# Altium PCB TK514_Interrupter.PcbDoc
Units mm, origin at the board's own origin, x right, y up, seen from the top; angles counter-clockwise.
Board outline 77.5 x 82.75 mm, 4 copper layers (TopLayer, InternalPlane1, InternalPlane2, BottomLayer); 48 components, 29 nets, 198 pads, 356 vias.
Unrouted connection lines stored in the file: 3.
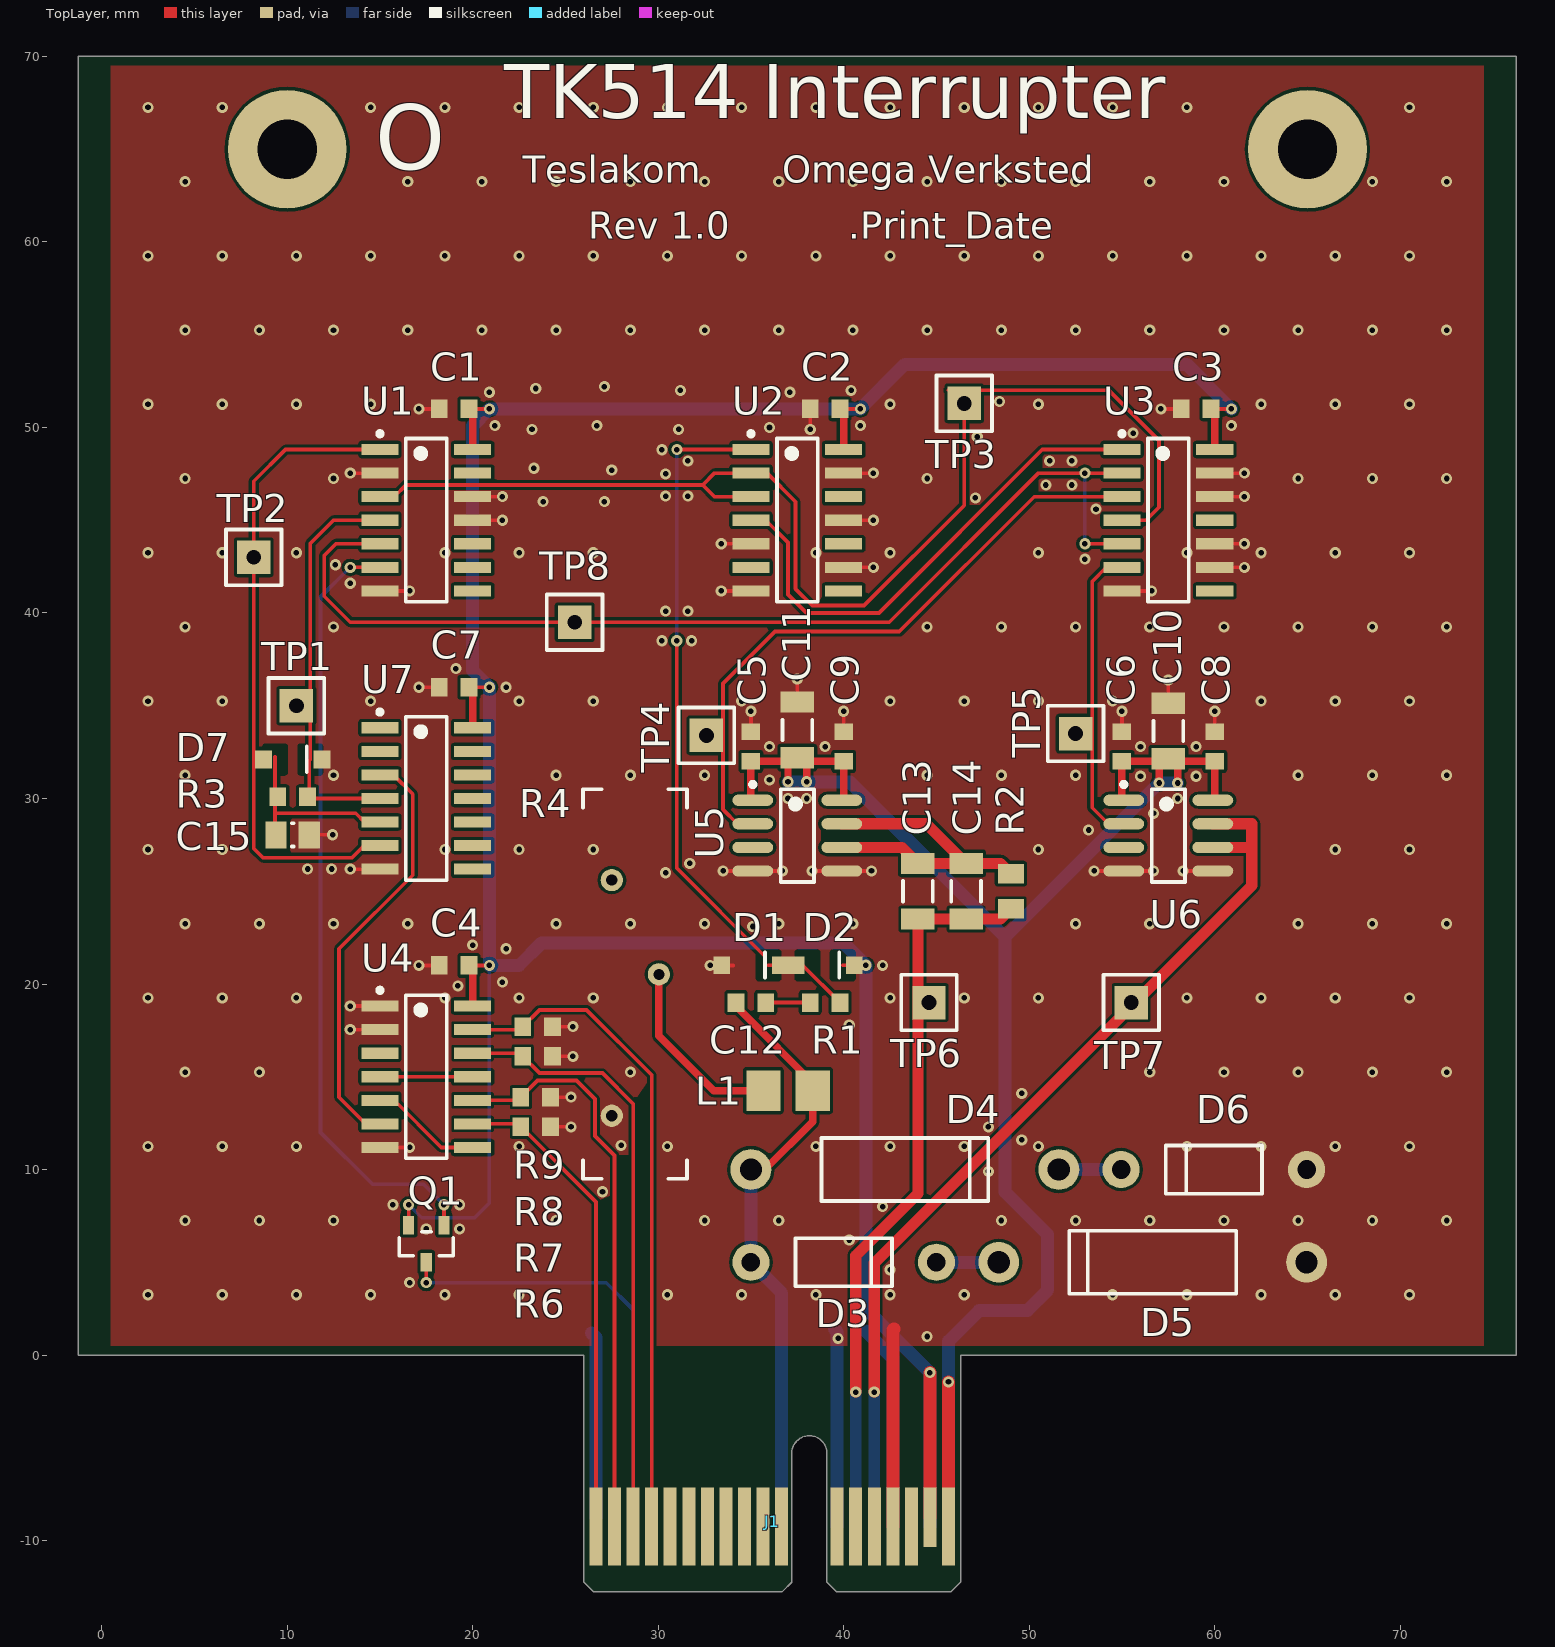
[diagram p0: TopLayer view]
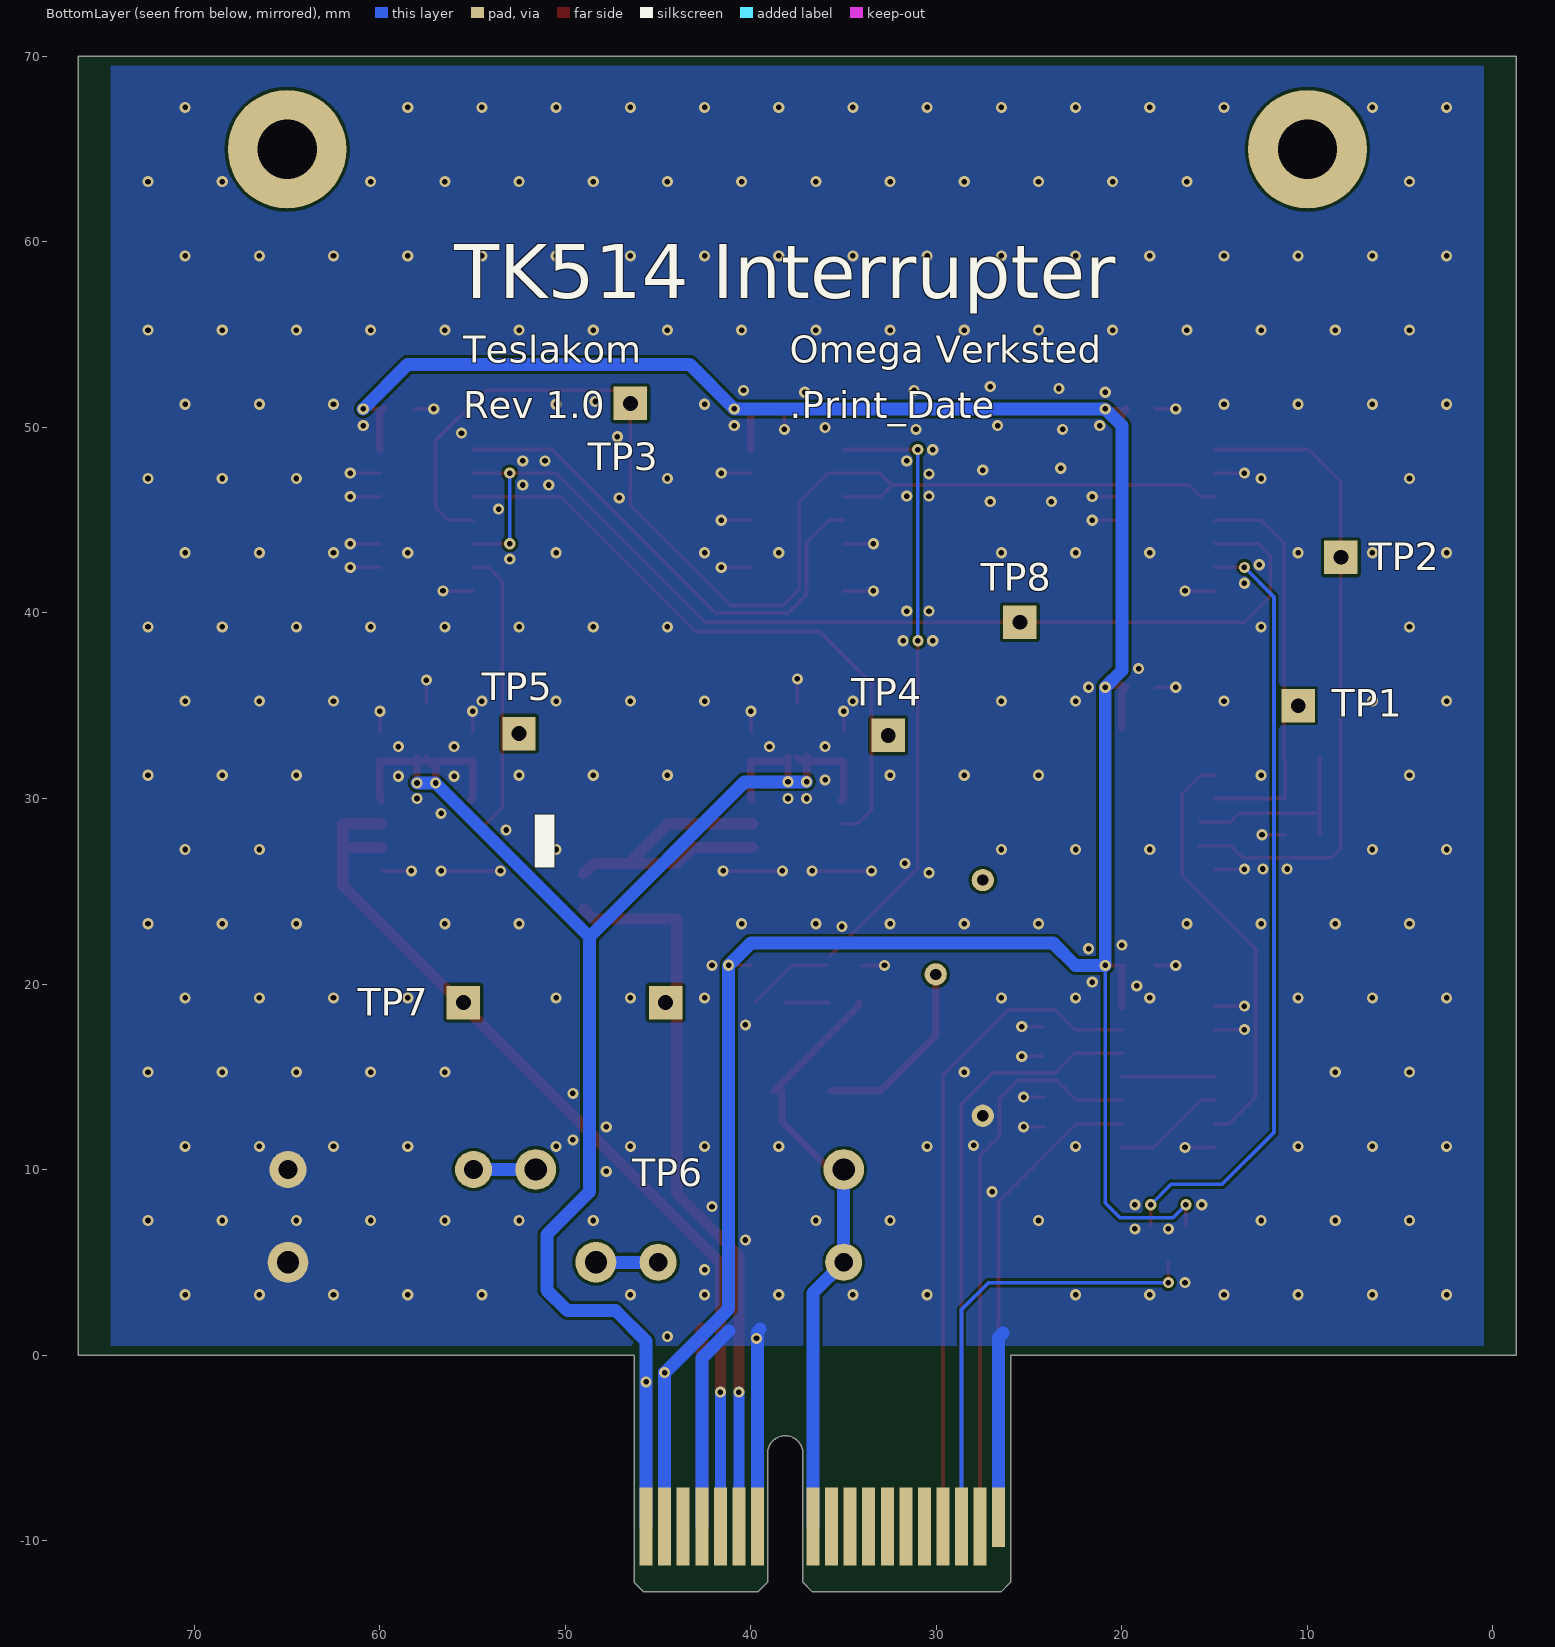
[diagram p1: BottomLayer view, seen from below]
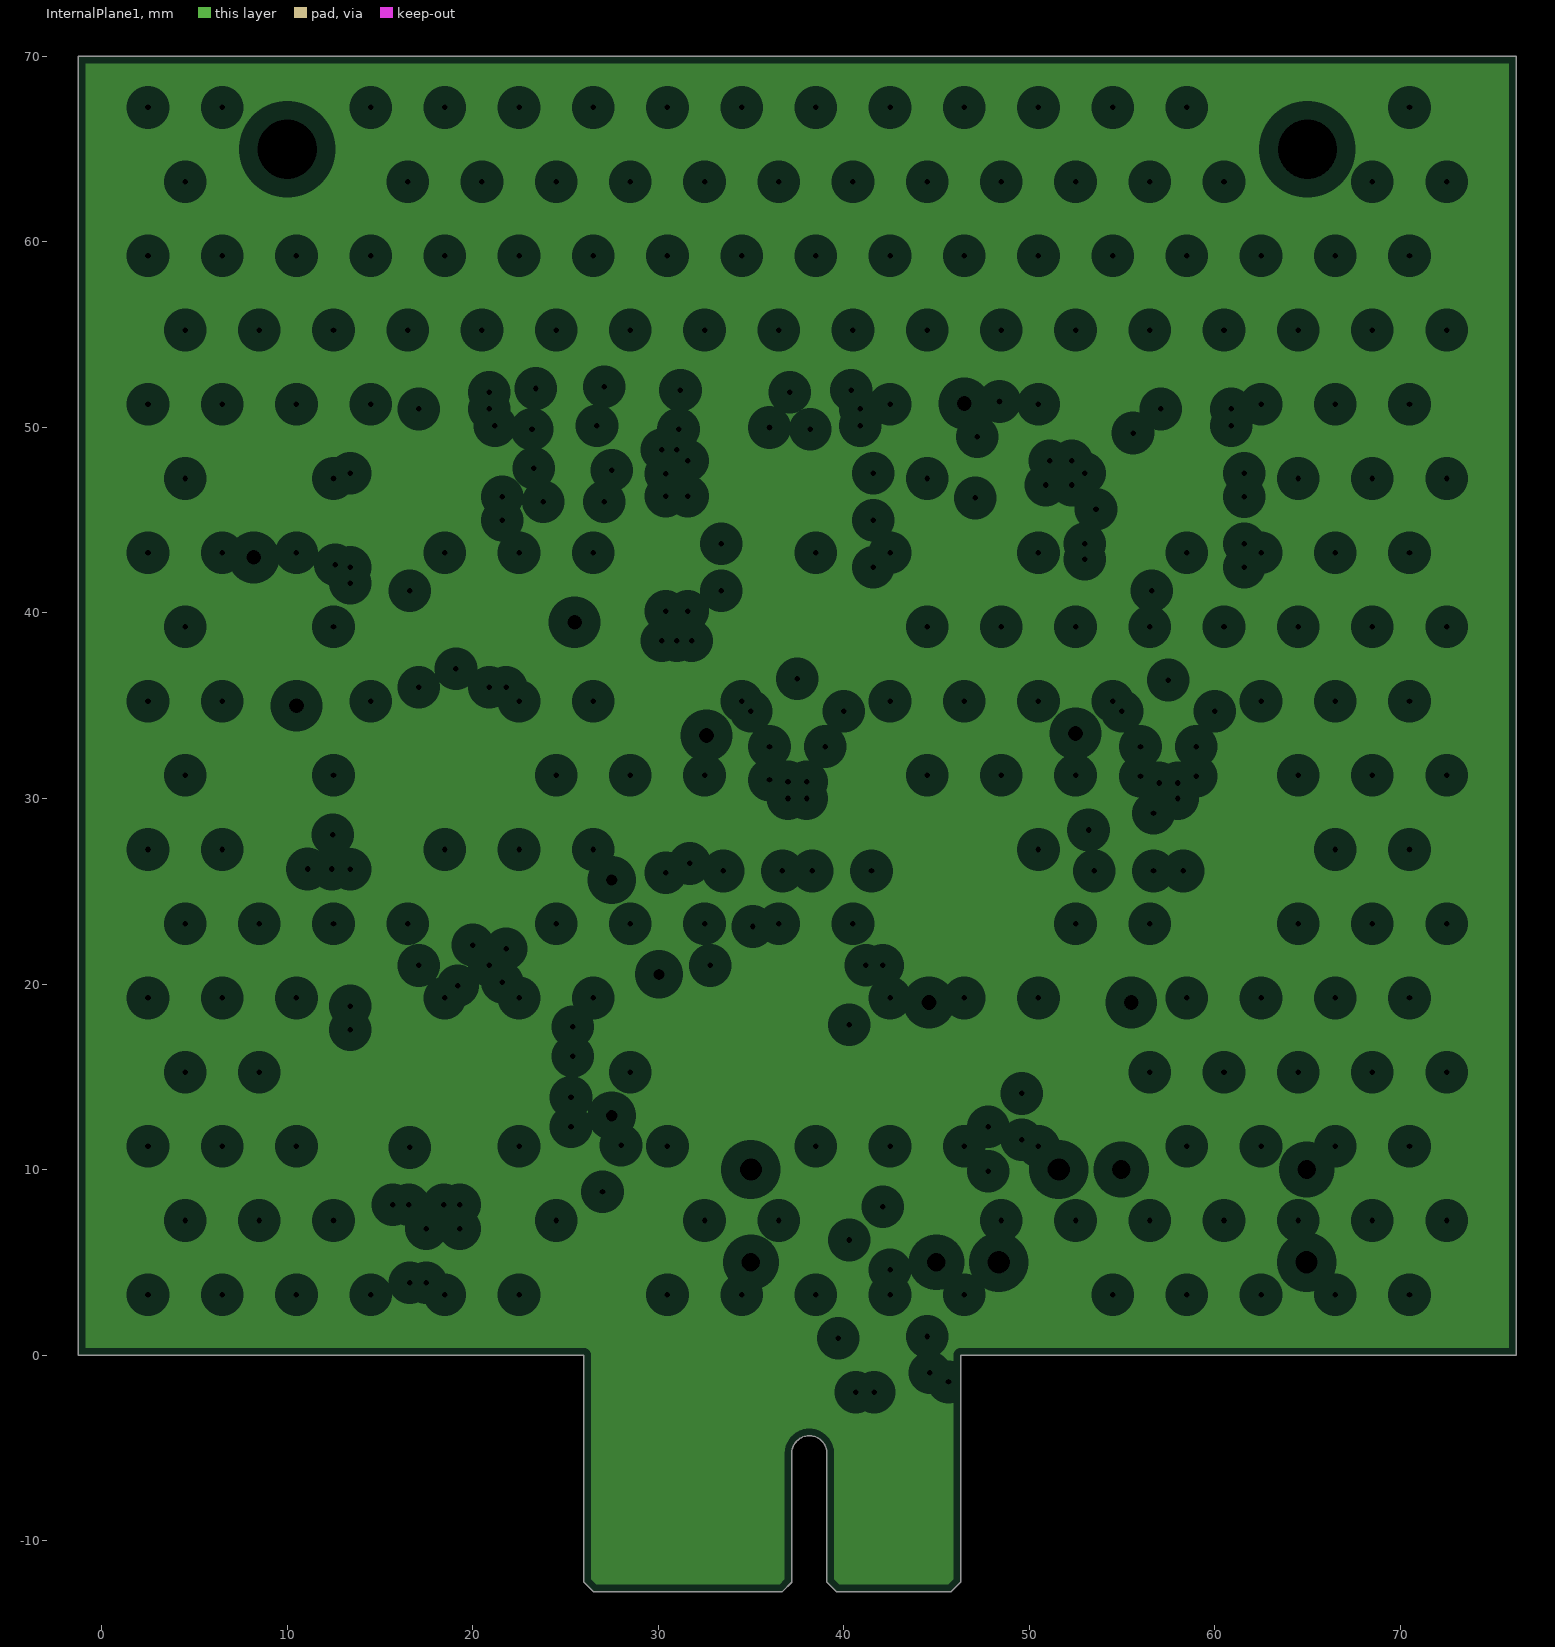
[diagram p2: InternalPlane1, clearances drawn from the general rule]
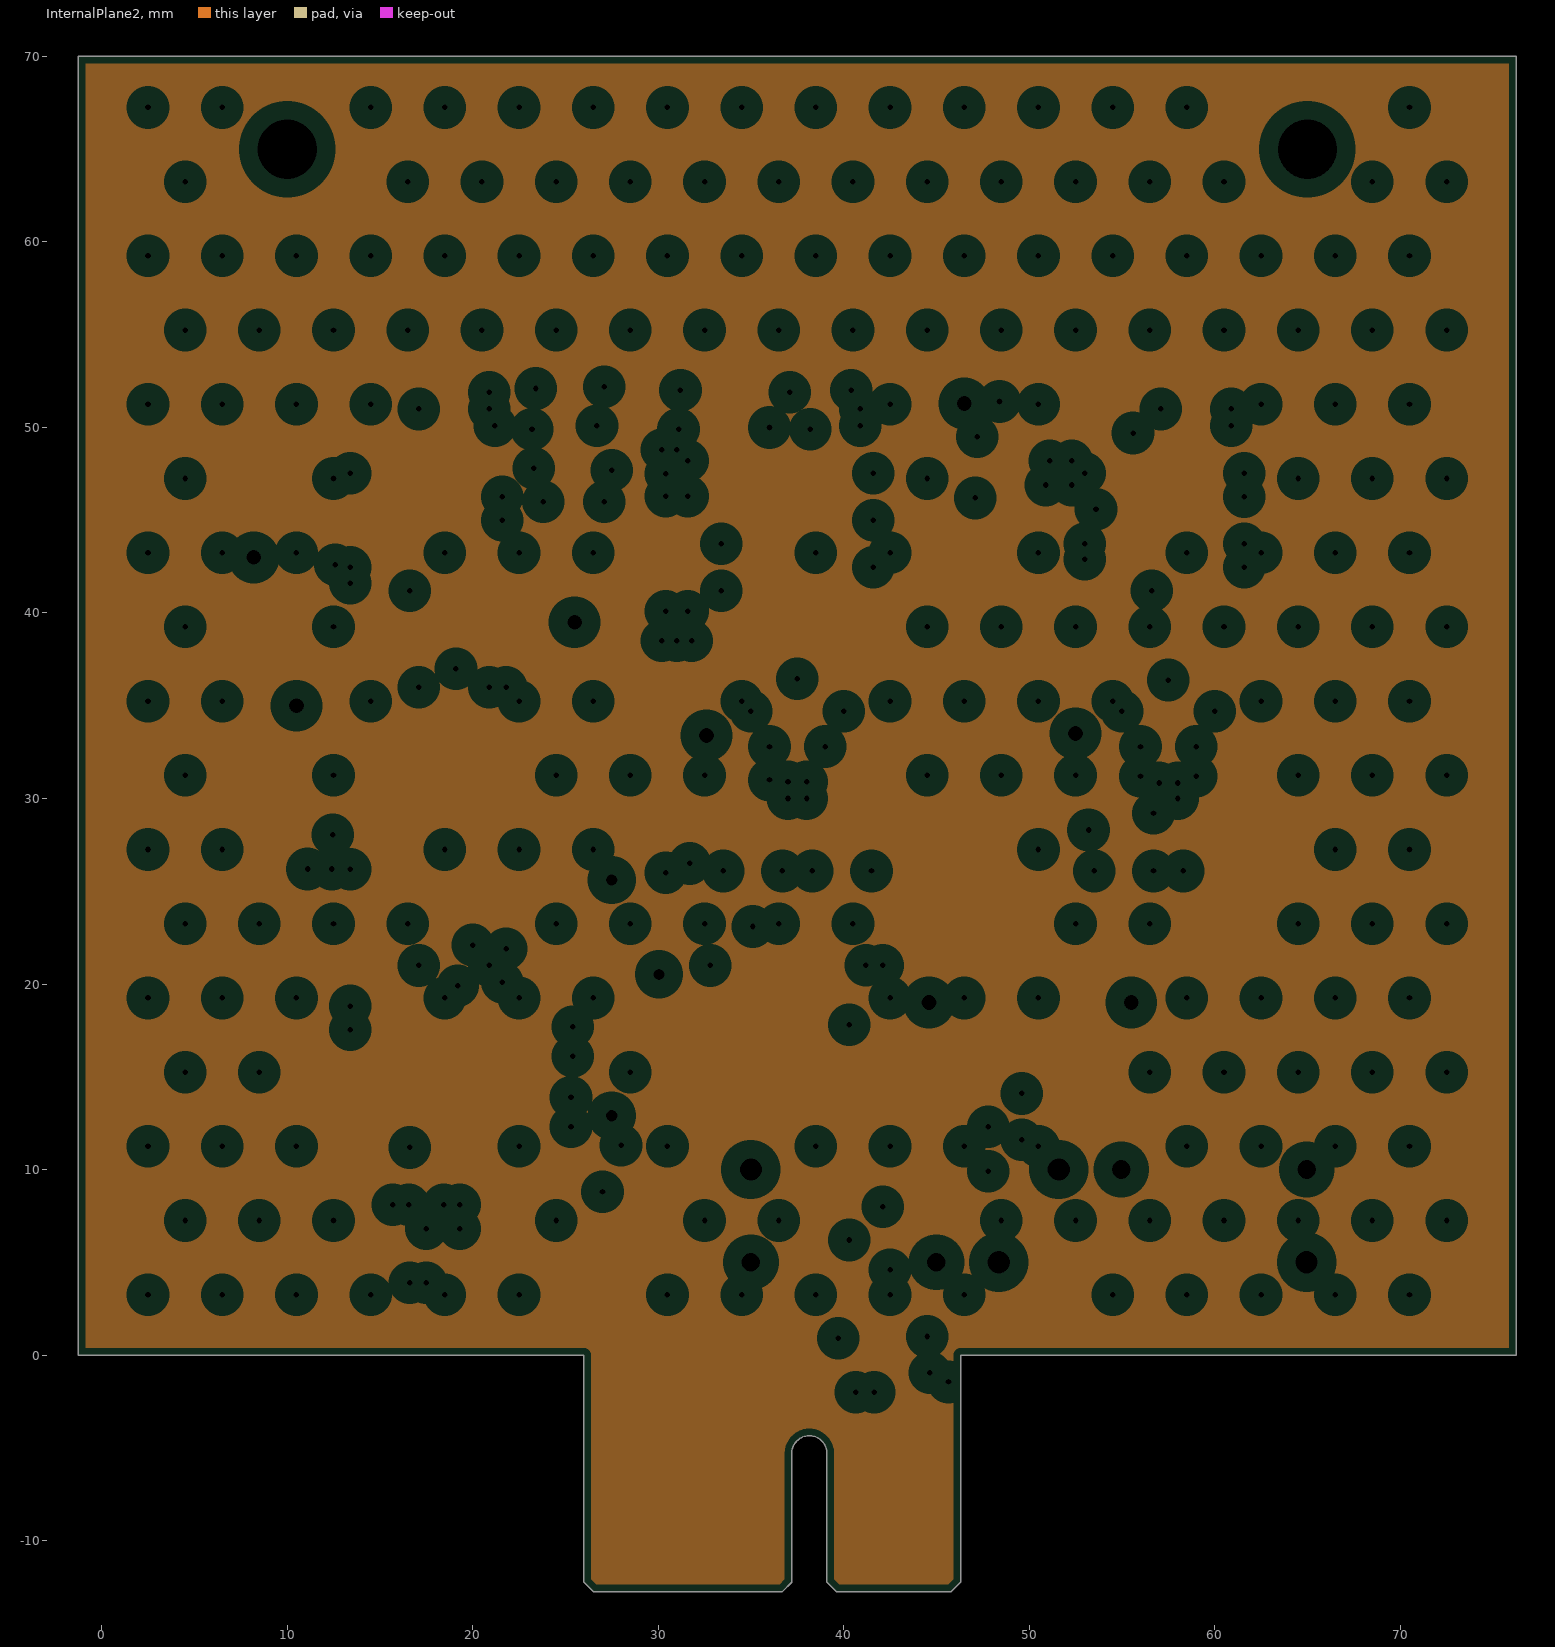
[diagram p3: InternalPlane2, clearances drawn from the general rule]

## Layer stack, top to bottom
TopSolder: solder mask 0.0102, Solder Resist, Dk 3.5
TopLayer: signal copper 0.0178
Dielectric1: core 0.32, FR-4, Dk 4.8
InternalPlane1: plane copper 0.0356
Dielectric2: prepreg 0.32, FR-4, Dk 4.8
InternalPlane2: plane copper 0.0356
Dielectric3: core 0.32, FR-4, Dk 4.8
BottomLayer: signal copper 0.0178
BottomSolder: solder mask 0.0102, Solder Resist, Dk 3.5

## Board outline
-1.25,0 14.35,0 26,0 26,-12.25 26.5,-12.75 36.7,-12.75 37.2,-12.25 37.2,-5.3 cw(c38.15,-5.3) 39.1,-5.3 39.1,-12.25 39.6,-12.75 45.8,-12.75 46.3,-12.25 46.3,0 76.25,0 76.25,70 -1.25,70

## Design rules (kind name [scope] priority, off if disabled: settings)
Clearance [All] p1: gap=0.16 ignorepadtopadclearanceinfootprint=FALSE except(0: Arc-Text Arc-Hole Track-Text Track-Hole SMDPad-Text SMDPad-Hole THPad-Text THPad-Hole Via-Text Via-Hole Fill-Text Fill-Hole Poly-Text Poly-Hole Region-Text Region-Hole Text-Text Text-Hole)
Height [All] p1: minheight=0 maxheight=200 prefheight=12.7
HoleSize [All] p1: absolutevalues=TRUE maxlimit=6.35 minlimit=0.3 maxpercent=80.000 minpercent=20.000
MinimumSolderMaskSliver [All] p1: minsoldermaskwidth=0.1
PlaneClearance [All] p1: clearance=1
PlaneConnect [All] p1: planeconnectstyle=Relief reliefexpansion=0.508 reliefentries=4 reliefconductorwidth=1 reliefairgap=0.254
PolygonConnect [All] p1: connectstyle=Direct reliefconductorwidth=0.254 reliefentries=4 polygonreliefangle="90 Angle" airgapwidth=0.254
RoomDefinition "No components" [All] p1: confinementstyle=ConfineOut formatcopy=TRUE lockcomponents=FALSE outline 0,70 0,0 5,0 5,60 15,60 15,70 0,70
RoomDefinition "No components_1" [All] p2: confinementstyle=ConfineOut formatcopy=TRUE lockcomponents=FALSE outline 75,0 70,0 70,60 60,60 60,70 75,70 75,0
RoomDefinition "No components_2" [All] p3: confinementstyle=ConfineOut formatcopy=TRUE lockcomponents=FALSE outline 46.3,0 26,0 26,-7 46.3,-7
RoutingVias [All] p1: holewidth=0.3 width=0.6 viastyle="Through Hole" minholewidth=0.3 minwidth=0.6 maxholewidth=6.35 maxwidth=10
SilkToSolderMaskClearance [IsPad] p1: minsilkscreentomaskgap=0.178 clearancetoexposedcopper=TRUE
SolderMaskExpansion [All] p1: expansion=0.102 istentingtop=FALSE
Width [All] p1: maxlimit=10 minlimit=0.16 preferedwidth=0.4
24 further rules are at their usual default settings.

## Components (designator, comment, footprint, x,y, rotation, side; value= is the part's Value field where it differs from the comment)
C1 "100nF" CAPC0603(1608)55_N 19,51 r0 top
C2 "100nF" CAPC0603(1608)55_N 39,51 r0 top
C3 "100nF" CAPC0603(1608)55_N 59,51 r0 top
C4 "100nF" CAPC0603(1608)55_N 19,21 r0 top
C5 "100nF" CAPC0603(1608)55_N 35,32.8 r270 top
C6 "100nF" CAPC0603(1608)55_N 55,32.8 r270 top
C7 "100nF" CAPC0603(1608)55_N 19,36 r0 top
C8 "100nF" CAPC0603(1608)55_N 60,32.8 r270 top
C9 "100nF" CAPC0603(1608)55_N 40,32.8 r270 top
C10 "1uF" CAPC1206(3216)170_N 57.5,33.634 r270 top
C11 "1uF" CAPC1206(3216)170_N 37.5,33.7 r270 top
C12 "100nF" CAPC0603(1608)55_N 35,19 r0 top
C13 "10uF" CAPC1206(3216)170_N 44,25 r270 top
C14 "10uF" CAPC1206(3216)170_N 46.604,25 r270 top
C15 "22nF" CAPC0805(2012)100_N 10.3,28.041 r180 top
D1 "1N4148 SMD" SOD123 39,21.004 r0 top
D2 "1N4148 SMD" SOD123 35,21.004 r0 top
D3 "1N5819" DO-41 40,5 r0 top
D4 "1N5337" DO-29 43.3,10 r0 top
D5 "1N5337" DO-29 56.654,5 r180 top
D6 "1N5819" DO-41 59.954,10 r180 top
D7 "1N4148 SMD" SOD123 10.3,32.1 r0 top
J1 "PCI_Express-36P" PCIeX1-GF-2D-1000-1K-O36 36.15,-9.25 r0 top
L1 "Spole 15H" INDP3225X20N 37,14.25 r180 top
Q1 "BSH201" SOT23-3_N 17.5,6 r0 top
R1 "1k" RESC0603(1608)_N 39,19 r0 top
R2 "10R" RESC0805(2012)_N 49.009,25 r270 top
R3 "20k" RESC0603(1608)_N 10.3,30.096 r180 top
R4 "Trimmepot 100ohm" TRIMPOT_3006P 28.75,20 r90 top
R6 "1M" RESC0603(1608)_N 23.4,12.3 r180 top
R7 "1M" RESC0603(1608)_N 23.4,13.9 r180 top
R8 "1M" RESC0603(1608)_N 23.5,16.1 r180 top
R9 "1M" RESC0603(1608)_N 23.5,17.7 r180 top
TP1 "Header1x1" HDRV1W64P254_1X1_254X254X900B 10.5,35 r0 top
TP2 "Header1x1" HDRV1W64P254_1X1_254X254X900B 8.2,43 r0 top
TP3 "Header1x1" HDRV1W64P254_1X1_254X254X900B 46.5,51.3 r0 top
TP4 "Header1x1" HDRV1W64P254_1X1_254X254X900B 32.6,33.4 r0 top
TP5 "Header1x1" HDRV1W64P254_1X1_254X254X900B 52.5,33.5 r0 top
TP6 "Header1x1" HDRV1W64P254_1X1_254X254X900B 44.6,19 r0 top
TP7 "Header1x1" HDRV1W64P254_1X1_254X254X900B 55.5,19 r0 top
TP8 "Header1x1" HDRV1W64P254_1X1_254X254X900B 25.5,39.5 r0 top
U1 "74HC74" SOIC-14 17.5,45 r0 top
U2 "74HC14" SOIC-14 37.5,45 r0 top
U3 "74HC08" SOIC-14 57.5,45 r0 top
U4 "74HC08" SOIC-14 17.5,15 r0 top
U5 "MIC4422YM" SOIC-8-WIDE 37.5,28 r0 top
U6 "MIC4422YM" SOIC-8-WIDE 57.5,28 r0 top
U7 "74HC14" SOIC-14 17.5,30 r0 top

## Footprints (in the part's own frame and the unit in brackets; to place one, negate y for a bottom-side part, rotate by r counter-clockwise, add the part's x,y. Pads: shape width x height; smd on the part's side, far side on the other; paste and mask are expansions set on the pad)
CAPC0603(1608)55_N [mm] "Chip Capacitor, Body 1.6x0.8mm, Height 0.55mm, IPC Medium Density"
  rect 0.9x1 smd: 1(-0.8,0) 2(0.8,0)
  body extent -0.87,-0.48 0.88,0.47, height 0.55
CAPC0805(2012)100_N [mm] "Chip Capacitor, Body 2.0x1.2mm, Height 1.0mm, IPC Medium Density"
  rect 1.15x1.45 smd: 1(-0.9,0) 2(0.9,0)
  silkscreen extent -0.05,-0.62 0.05,0.63, body extent -1.1,-0.72 1.1,0.73, height 1
CAPC1206(3216)170_N [mm] "Chip Capacitor, Body 3.2x1.6mm, Height 1.7mm, IPC Medium Density"
  rect 1.15x1.8 smd: 1(-1.5,0) 2(1.5,0)
  silkscreen extent -0.55,-0.8 0.55,0.8, body extent -1.7,-0.9 1.7,0.9, height 1.7
DO-29 [mm]
  round 2.2 hole 1.2: 1(-8.3,0) 2(8.3,0)
  silkscreen extent -4.5,-1.7 4.5,1.7, body extent -8.75,-1.77 8.75,1.77, height 3.77
DO-41 [mm]
  round 2 hole 1: 1(-5,0) 2(5,0)
  silkscreen extent -2.6,-1.3 2.6,1.3, body extent -5.51,-1.36 5.51,1.36, height 3.22
HDRV1W64P254_1X1_254X254X900B [mm] "Header 1x1"
  rect 1.8x1.8 hole 0.8: 1(0,0)
  silkscreen extent -1.5,-1.5 1.5,1.5
INDP3225X20N [mm] "Precision Wire Wound Inductor, 2-Leads, Body 3,20x2,50mm, IPC Medium Density"
  rect 1.85x2.2 smd: 1(-1.325,0) 2(1.325,0)
  body extent -1.6,-1.25 1.6,1.25, height 1.99
PCIeX1-GF-2D-1000-1K-O36 [mm] "Golden finger, PCIeX1, Dual, Opposite, Pitch 1mm, 36-Position"
  rect 0.7x3.2 smd far side paste-1: A1(-9.5,0.5)
  rect 0.7x4.2 smd far side paste-1: A2(-8.5,0) A3(-7.5,0) A4(-6.5,0) A5(-5.5,0) A6(-4.5,0) A7(-3.5,0) A8(-2.5,0) A9(-1.5,0) A10(-0.5,0) A11(0.5,0) A12(3.5,0) A13(4.5,0) A14(5.5,0) A15(6.5,0) A16(7.5,0) A17(8.5,0) A18(9.5,0)
  rect 0.7x4.2 smd paste-1: B1(-9.5,0) B2(-8.5,0) B3(-7.5,0) B4(-6.5,0) B5(-5.5,0) B6(-4.5,0) B7(-3.5,0) B8(-2.5,0) B9(-1.5,0) B10(-0.5,0) B11(0.5,0) B12(3.5,0) B13(4.5,0) B14(5.5,0) B15(6.5,0) B16(7.5,0) B18(9.5,0)
  rect 0.7x3.2 smd paste-1: B17(8.5,0.5)
RESC0603(1608)_N [mm] "Chip Resistor, Body 1.6x0.8mm, IPC Medium Density"
  rect 0.9x1 smd: 1(-0.8,0) 2(0.8,0)
  body extent -0.85,-0.47 0.85,0.47, height 0.6
RESC0805(2012)_N [mm] "Chip Resistor, Body 2.0x1.3mm, IPC Medium Density"
  rect 1.05x1.4 smd: 1(-0.95,0) 2(0.95,0)
  body extent -1.15,-0.67 1.15,0.68, height 0.76
SOD123 [mm] "SOD123 1N4148W BAV16W"
  rect 0.9x0.95 smd: 1(-1.575,0) 2(1.575,0)
  silkscreen extent 0.75,-0.67 0.75,0.71, body extent -1.42,-0.85 1.43,0.85, height 1.35
SOIC-8-WIDE [mm] "SOIC, 8-Leads, Body 4.9x3.9mm, Pitch 1.27mm, IPC Medium Density"
  oval 2.2x0.6 smd: 1(-2.4,1.905) 2(-2.4,0.635) 3(-2.4,-0.635) 4(-2.4,-1.905) 5(2.4,-1.905) 6(2.4,-0.635) 7(2.4,0.635) 8(2.4,1.905)
  silkscreen extent -2.52,-2.5 0.9,2.88, body extent -3,-2.5 3.2,2.5, height 1.75
SOIC-14 [mm]
  rect 2x0.6 smd: 1(-2.5,3.81) 2(-2.5,2.54) 3(-2.5,1.27) 4(-2.5,0) 5(-2.5,-1.27) 6(-2.5,-2.54) 7(-2.5,-3.81) 8(2.5,-3.81) 9(2.5,-2.54) 10(2.5,-1.27) 11(2.5,0) 12(2.5,1.27) 13(2.5,2.54) 14(2.5,3.81)
  silkscreen extent -2.62,-4.4 1.1,4.78, body extent -3,-4.37 3,4.38, height 1.75
SOT23-3_N [mm] "SOT23, 3-Leads, Body 1.3x2.9mm, Pitch 0.95mm"
  rect 0.6x1 smd paste-0.05: 1(0.95,1) 2(-0.95,1) 3(0,-1)
  silkscreen extent -1.45,-0.65 1.45,0.65, body extent -1.45,-1.4 1.45,1.4, height 1.3
TRIMPOT_3006P [mm] "Bourns horizontal trimpot type 3006P"
  round 1.2 hole 0.6: 1(-7.1,1.25) 2(0.52,-1.29) 3(5.6,1.25)
  silkscreen extent -10.5,-2.8 10.5,2.8, body extent -10.15,-2.43 10.15,2.4, height 6.55

## Part data
C1 C2 C3 C4 C5 C6 C7 C8 C9 C12: library part 5152, "X7R 50V 5%", antall=1000, dybde=0, hylle=0, id=5152, komponenttype=2, lager_type=Baklager, leverandor=Farnell, leverandor_varenr=1759122, navn=100nF, nokkelord="Kondensator, Capacitor, CAP", pakke_opprettet="18/02/2015 14:18:13", pakke_opprettet_av=815, pakketype=0603, pris=1, produsent=Multicomp, rad=21, rom=OV, symbol_opprettet="14/11/2014 20:19:34", symbol_opprettet_av=815
C10 C11: library part 5154, "X7R 50V", id=5154, komponenttype=2, leverandor=Farnell, leverandor_varenr=1759454, navn=1uF, nokkelord="Kondensator, capacitor", pakke_opprettet="11/02/2015 13:21:22", pakke_opprettet_av=815, pakketype=1206, pris=2, produsent=Multicomp, symbol_opprettet="14/11/2014 20:19:34", symbol_opprettet_av=815
C13 C14: library part 5059, "X5R 50V 10%", id=5059, komponenttype=2, leverandor=Farnell, leverandor_varenr=2672214, navn=10uF, nokkelord="Kondensator, capacitor", pakke_opprettet="11/02/2015 13:21:22", pakke_opprettet_av=815, pakketype=1206, pris=6, produsent=Murata, symbol_opprettet="14/11/2014 20:19:34", symbol_opprettet_av=815
C15: library part 3491, "X7R 50V", antall=15, dybde=2, hylle=4, id=3491, komponenttype=2, lager_type=Baklager, leverandor=Farnell, leverandor_varenr=1414682, navn=22nF, nokkelord="Capacitor Cap Kondis", pakke_opprettet="14/11/2014 20:52:01", pakke_opprettet_av=815, pakketype=0805, pris=1, produsent=Multicomp, rad=5, rom=OV, symbol_opprettet="14/11/2014 20:19:34", symbol_opprettet_av=815
D1 D2 D7: library part 4485, "SMD signaldiode", antall=894, dybde=2, hylle=2, id=4485, komponenttype=9, lager_type=Fremlager, leverandor=Farnell, leverandor_varenr=8150206, navn="1N4148 SMD", pakke_opprettet="11/05/2018 20:10:55", pakke_opprettet_av=1165, pakketype=SOD123, pris=1, produsent="Taiwan Semiconductor", rad=3, rom=OV, symbol_opprettet="28/06/2014 15:10:17", symbol_opprettet_av=815
D3 D6: library part 5238, "Schottkydiode, 1A, 40V", antall=25, dybde=0, hylle=2, id=5238, komponenttype=9, lager_type=Fremlager, leverandor=Farnell, leverandor_varenr=1336533, navn=1N5819, nokkelord="schottky, diode", pakke_opprettet="28/06/2014 16:50:18", pakke_opprettet_av=815, pakketype=DO, pris=2, produsent=Multicomp, rad=0, rom=OV, symbol_opprettet="28/06/2014 15:20:09", symbol_opprettet_av=815
D4 D5: library part 3264, "Zenerdiode 4.7V 5W", id=3264, komponenttype=9, leverandor=Farnell, leverandor_varenr=9557946, navn=1N5337, pakke_opprettet="28/06/2014 16:16:55", pakke_opprettet_av=815, pakketype=DO, pris=5, produsent="ON Semiconductor", symbol_opprettet="28/06/2014 15:11:05", symbol_opprettet_av=815
J1: library part 3037, "PCI express PCB kortkankonnektor", id=3037, komponenttype=11, navn=PCIeX1-GF-2D-1000-1K-O36, pakke_opprettet="07/06/2015 17:49:10", pakke_opprettet_av=815, pakketype=-, pris=0, produsent="PCB feature", symbol_opprettet="06/07/2014 17:26:37", symbol_opprettet_av=815
L1: library part 6201, "Wirewound Inductor, 15 µH, 2.8 ohm, 20 MHz, 130 mA", id=6201, komponenttype=3, leverandor=Farnell, leverandor_varenr=2747875, navn="Spole 15H", nokkelord="Spole, coil, inductor, wirewound", pakke_opprettet="26/05/2015 23:51:10", pakke_opprettet_av=924, pakketype=1210, pris=4, produsent=TDK, symbol_opprettet="27/05/2015 00:20:21", symbol_opprettet_av=924
Q1: library part 3085, "P-Channel MOSFET 300mA", antall=51, dybde=0, hylle=3, id=3085, komponenttype=4, lager_type=Fremlager, leverandor=Farnell, leverandor_varenr=1758073, navn=BSH201, pakke_opprettet="08/07/2014 20:37:25", pakke_opprettet_av=815, pakketype=SOT, pris=3, produsent="NXP Semiconductors", rad=3, rom=OV, Status=New, symbol_opprettet="14/09/2016 17:47:57", symbol_opprettet_av=1150
R1: library part 5339, "0.1W 1% Thick film resistor", id=5339, komponenttype=1, leverandor=Farnell, leverandor_varenr=2447272, navn=1k, nokkelord="Resistor Motstand", pakke_opprettet="08/07/2014 21:15:30", pakke_opprettet_av=815, pakketype=0603, pris=0, produsent=Multicomp, symbol_opprettet="08/07/2014 21:16:33", symbol_opprettet_av=815
R2: library part 5040, "0.1W 1% Thick film resistor", antall=200, dybde=0, hylle=6, id=5040, komponenttype=1, lager_type=Fremlager, leverandor=Farnell, leverandor_varenr=2447556, navn=10R, nokkelord="Resistor Motstand", pakke_opprettet="27/01/2016 14:23:16", pakke_opprettet_av=815, pakketype=0805, pris=0, produsent=Multicomp, rad=2, rom=OV, symbol_opprettet="08/07/2014 21:16:33", symbol_opprettet_av=815
R3: library part 5357, "0.1W 1% Thick film resistor", antall=3, dybde=79, hylle=2, id=5357, komponenttype=1, lager_type=Fremlager, leverandor=Farnell, leverandor_varenr=2447293, navn=20k, pakke_opprettet="08/07/2014 21:15:30", pakke_opprettet_av=815, pakketype=0603, pris=0, produsent=Multicomp, rad=-1, rom=OV, symbol_opprettet="08/07/2014 21:16:33", symbol_opprettet_av=815
R4: library part 3823, "15 turn, horizontal", antall=54, dybde=0, hylle=3, id=3823, komponenttype=1, lager_type=Fremlager, leverandor=Farnell, leverandor_varenr=9352279, navn="Trimmepot 100ohm", nokkelord=trimpot, pakke_opprettet="10/02/2017 15:29:47", pakke_opprettet_av=815, pakketype=TH, pris=15, produsent=Bourns, rad=1, rom=OV, symbol_opprettet="03/11/2016 15:34:07", symbol_opprettet_av=815
R6 R7 R8 R9: library part 5340, "0.1W 1% Thick film resistor", antall=100, dybde=119, hylle=2, id=5340, komponenttype=1, lager_type=Fremlager, leverandor=Farnell, leverandor_varenr=2073358, navn=1M, nokkelord="Resistor Motstand", pakke_opprettet="08/07/2014 21:15:30", pakke_opprettet_av=815, pakketype=0603, pris=0, produsent=Multicomp, rad=-1, rom=OV, symbol_opprettet="08/07/2014 21:16:33", symbol_opprettet_av=815
TP1 TP2 TP3 TP4 TP5 TP6 TP7 TP8: library part 5093, "2,54mm pitch", id=5093, komponenttype=11, navn="Header 1x1", pakke_opprettet="13/11/2014 12:30:32", pakke_opprettet_av=815, pakketype=TH, pris=1, symbol_opprettet="13/11/2014 10:58:46", symbol_opprettet_av=815
U1: library part 3211, "Dual D flip flop", id=3211, komponenttype=8, leverandor=Farnell, leverandor_varenr=9591680, navn=74HC74, nokkelord=Logikk, pakke_opprettet="28/06/2014 18:13:44", pakke_opprettet_av=815, pakketype=SOIC, pris=4, produsent="Texas Instruments", symbol_opprettet="28/06/2014 15:25:05", symbol_opprettet_av=815
U2 U7: library part 4400, "Hex Schmitt trigger", id=4400, komponenttype=8, leverandor=Farnell, leverandor_varenr=1607772, navn=74HC14, nokkelord=Logikk, pakke_opprettet="28/06/2014 18:13:44", pakke_opprettet_av=815, pakketype=SOIC, pris=4, produsent="ON Semiconductor", symbol_opprettet="28/06/2014 15:23:38", symbol_opprettet_av=815
U3 U4: library part 3238, "Quad And Gate", antall=60, dybde=17, hylle=1, id=3238, komponenttype=8, lager_type=Fremlager, leverandor=Farnell, leverandor_varenr=9590986, navn=74HC08, pakke_opprettet="28/06/2014 18:13:44", pakke_opprettet_av=815, pakketype=SOIC, pris=3, produsent=Toshiba, rad=0, rom=OV, symbol_opprettet="28/06/2014 15:22:08", symbol_opprettet_av=815
U5 U6: library part 3223, "Mosfet Driver", id=3223, leverandor=Farnell, leverandor_varenr=2510119, navn=MIC4422YM, pakke_opprettet="28/06/2014 18:39:37", pakke_opprettet_av=815, pakketype=SOIC, pris=20, produsent=Microchip, symbol_opprettet="28/06/2014 15:39:18", symbol_opprettet_av=815

## Free pads (board coordinates)
  round 6.4 hole 3.2 unplated: 0(10,65) 0(65,65)

## Via types
v1: diameter 0.6, hole 0.3, TopLayer to BottomLayer, tented both sides, 356 vias

## Nets (pads, with @x,y where several pads share a name; then routed paths per layer and width w, separated by ;. In a path a pad name is that pad's centre, name@x,y a point inside that pad or via, vN(x,y) a via of type N, cw(c..) or ccw(c..) an arc to the next point about the centre after c; other vN are vias at no path point)
AUX2_A: C13.2 C14.2 J1.A13 R2.2 TP6.1 | length 39.4
  TopLayer w0.6: v1(40.65,-2) 40.65,5.35 44,8.7 C13.2 C14.2 48.459,23.5 R2.2
  BottomLayer w0.6: J1.A13 v1(40.65,-2)
AUX2_B: J1.A14 TP7.1 U6.6 U6.7 | length 50.5
  TopLayer w0.6: v1(41.65,-2) 41.65,4.95 62,25.3 62,27.365 ; U6.6 62,27.365 ; U6.7 62,28.635 62,27.365
  BottomLayer w0.6: J1.A14 v1(41.65,-2)
Feedback_input: C12.1 D3.1 D4.1 J1.A11 L1.1 | length 33.1
  TopLayer w0.4: C12.1 34.2,18.8 38.75,14.25 L1.1 38.325,12.575 35.75,10 D4.1
  BottomLayer w0.7: D4.1 D3.1 36.65,3.35 J1.A11
GND: C1.1 C2.1 C3.1 C4.1 C5.1 C6.1 C7.1 C8.1 C9.1 C10.1 C11.1 C15.1 D2.1 D5.1 D6.1 J1.A1 J1.A12 J1.A15 J1.B15 R4.1 R6.1 R7.1 R8.1 R9.1 U1.2 U1.7 U1.11 U1.12 U2.5 U2.7 U2.9 U2.11 U2.13 U3.7 U3.9 U3.10 U3.12 U3.13 U4.1 U4.2 U4.7 U5.4 U5.5 U6.4 U6.5 U7.7 | length 101.9
  TopLayer w0.2: C15.1 11.204,28.046 v1(12.45,28.046) ; v1(13.4,17.54) U4.2 ; v1(13.4,18.81) U4.1 ; v1(13.4,26.19) U7.7 ; v1(13.4,47.54) U1.2 ; U4.7 v1(16.6,11.19) ; U1.7 v1(16.6,41.19) ; v1(17.1,21) C4.1 ; v1(17.1,36) C7.1 ; v1(17.1,51) C1.1 ; U1.11 v1(21.6,45) ; U1.12 v1(21.6,46.27) ; R6.1 v1(25.3,12.3) ; R7.1 v1(25.3,13.9) ; R8.1 v1(25.4,16.1) ; R9.1 v1(25.4,17.7) ; v1(32.8,21) 34.046,21 34.05,21.004 ; v1(33.4,41.19) U2.7 ; v1(33.4,43.73) U2.5 ; v1(33.5,26.095) U5.4 v1(36.7,26.095) ; C5.1 v1(35,34.7) ; v1(37.496,36.45) 37.496,35.204 C11.1 ; v1(38.2,49.9) C2.1 ; v1(38.3,26.095) U5.5 v1(41.5,26.095) ; C9.1 v1(40,34.7) ; U2.9 v1(41.6,42.46) ; U2.11 v1(41.6,45) ; U2.13 v1(41.6,47.54) ; v1(53.5,26.095) U6.4 v1(56.7,26.095) ; C6.1 v1(55,34.7) ; U3.7 v1(56.6,41.19) ; v1(57.1,51) C3.1 ; v1(57.496,36.384) 57.496,35.139 C10.1 ; v1(58.3,26.095) U6.5 ; C8.1 v1(60,34.7) ; U3.9 v1(61.6,42.46) ; U3.10 v1(61.6,43.73) ; U3.12 v1(61.6,46.27) ; U3.13 v1(61.6,47.54)
  TopLayer w0.7: J1.B15 42.65,1.35 42.7,1.4
  BottomLayer w0.7: 26.4,1.2 26.65,0.95 J1.A1 ; 39.5,1.4 39.65,1.25 J1.A12 ; 41.192,1.292 42.65,-0.166 J1.A15
  other v1: 39.7,0.9 44.5,1 2.5,3.25 6.5,3.25 10.5,3.25 14.5,3.25 18.5,3.25 22.5,3.25 30.5,3.25 34.5,3.25 38.5,3.25 42.5,3.25 46.5,3.25 54.5,3.25 58.5,3.25 62.5,3.25 66.5,3.25 70.5,3.25 16.6,3.9 42.5,4.6 40.3,6.2 17.5,6.8 19.3,6.8 4.5,7.25 8.5,7.25 12.5,7.25 24.5,7.25 32.5,7.25 36.5,7.25 48.5,7.25 52.5,7.25 56.5,7.25 60.5,7.25 64.5,7.25 68.5,7.25 72.5,7.25 42.1,8 15.7,8.1 19.3,8.1 27,8.8 47.8,9.9 2.5,11.25 6.5,11.25 10.5,11.25 22.5,11.25 30.5,11.25 38.5,11.25 42.5,11.25 46.5,11.25 50.5,11.25 58.5,11.25 62.5,11.25 66.5,11.25 70.5,11.25 28,11.3 49.6,11.6 47.8,12.3 49.6,14.1 4.5,15.25 8.5,15.25 28.5,15.25 56.5,15.25 60.5,15.25 64.5,15.25 68.5,15.25 72.5,15.25 40.3,17.8 2.5,19.25 6.5,19.25 10.5,19.25 18.5,19.25 22.5,19.25 26.5,19.25 42.5,19.25 46.5,19.25 50.5,19.25 58.5,19.25 62.5,19.25 66.5,19.25 70.5,19.25 19.2,19.9 21.6,20.1 42.1,21 21.8,21.9 20,22.1 35.1,23.1 4.5,23.25 8.5,23.25 12.5,23.25 16.5,23.25 24.5,23.25 28.5,23.25 32.5,23.25 36.5,23.25 40.5,23.25 52.5,23.25 56.5,23.25 64.5,23.25 68.5,23.25 72.5,23.25 30.4,26 11.1,26.2 12.4,26.2 31.7,26.5 2.5,27.25 6.5,27.25 18.5,27.25 22.5,27.25 26.5,27.25 50.5,27.25 66.5,27.25 70.5,27.25 53.2,28.3 56.7,29.2 37,30 38,30 58,30 36,31 56,31.2 59,31.2 4.5,31.25 12.5,31.25 24.5,31.25 28.5,31.25 32.5,31.25 44.5,31.25 48.5,31.25 52.5,31.25 64.5,31.25 68.5,31.25 72.5,31.25 36,32.8 39,32.8 56,32.8 59,32.8 2.5,35.25 6.5,35.25 14.5,35.25 22.5,35.25 26.5,35.25 34.5,35.25 42.5,35.25 46.5,35.25 50.5,35.25 54.5,35.25 62.5,35.25 66.5,35.25 70.5,35.25 21.8,36 19.1,37 30.2,38.5 31.8,38.5 4.5,39.25 12.5,39.25 44.5,39.25 48.5,39.25 52.5,39.25 56.5,39.25 60.5,39.25 64.5,39.25 68.5,39.25 72.5,39.25 30.4,40.1 31.6,40.1 13.4,41.6 12.6,42.6 53,42.9 2.5,43.25 6.5,43.25 10.5,43.25 18.5,43.25 22.5,43.25 26.5,43.25 38.5,43.25 42.5,43.25 50.5,43.25 58.5,43.25 62.5,43.25 66.5,43.25 70.5,43.25 53.6,45.6 23.8,46 27.1,46 47.1,46.2 30.4,46.3 31.6,46.3 50.9,46.9 52.3,46.9 4.5,47.25 12.5,47.25 44.5,47.25 64.5,47.25 68.5,47.25 72.5,47.25 30.4,47.5 27.5,47.7 23.3,47.8 31.6,48.2 51.1,48.2 52.3,48.2 30.2,48.8 47.2,49.5 55.6,49.7 23.2,49.9 31.1,49.9 36,50 21.2,50.1 26.7,50.1 40.9,50.1 60.9,50.1 2.5,51.25 6.5,51.25 10.5,51.25 14.5,51.25 42.5,51.25 50.5,51.25 62.5,51.25 66.5,51.25 70.5,51.25 48.4,51.4 20.9,51.9 37.1,51.9 31.2,52 40.4,52 23.4,52.1 27.1,52.2 4.5,55.25 8.5,55.25 12.5,55.25 16.5,55.25 20.5,55.25 24.5,55.25 28.5,55.25 32.5,55.25 36.5,55.25 40.5,55.25 44.5,55.25 48.5,55.25 52.5,55.25 56.5,55.25 60.5,55.25 64.5,55.25 68.5,55.25 72.5,55.25 2.5,59.25 6.5,59.25 10.5,59.25 14.5,59.25 18.5,59.25 22.5,59.25 26.5,59.25 30.5,59.25 34.5,59.25 38.5,59.25 42.5,59.25 46.5,59.25 50.5,59.25 54.5,59.25 58.5,59.25 62.5,59.25 66.5,59.25 70.5,59.25 4.5,63.25 16.5,63.25 20.5,63.25 24.5,63.25 28.5,63.25 32.5,63.25 36.5,63.25 40.5,63.25 44.5,63.25 48.5,63.25 52.5,63.25 56.5,63.25 60.5,63.25 68.5,63.25 72.5,63.25 2.5,67.25 6.5,67.25 14.5,67.25 18.5,67.25 22.5,67.25 26.5,67.25 30.5,67.25 34.5,67.25 38.5,67.25 42.5,67.25 46.5,67.25 50.5,67.25 54.5,67.25 58.5,67.25 70.5,67.25
INTERRUPT_BUS: J1.B4 R9.2 U4.13 | length 35.9
  TopLayer w0.2: U4.13 22.54,17.54 R9.2 23.6,18.6 26.14,18.6 29.65,15.09 J1.B4
KORT_INNSATT_BUS: J1.B1 R6.2 U4.9 | length 25.9
  TopLayer w0.2: U4.9 22.44,12.46 R6.2 26.65,8.25 J1.B1
LIMIT_BUS: J1.B3 R8.2 U4.12 | length 32.6
  TopLayer w0.2: U4.12 22.53,16.27 R8.2 23.6,15.2 27,15.2 28.65,13.55 J1.B3
NetC12_2: C12.2 R1.1 | length 2.4
  TopLayer w0.2: C12.2 R1.1
NetC13_1: C13.1 C14.1 R2.1 U5.6 U5.7 | length 17.3
  TopLayer w0.6: U5.6 43.135,27.365 C13.1 C14.1 ; U5.7 44.469,28.635 C14.1 ; R2.1 48.459,26.5 C14.1
NetC15_2: C15.2 D7.1 R3.2 U7.5 | length 10.8
  TopLayer w0.2: C15.2@9.35,28.091 9.35,29.2 ; 9.35,32.25 9.35,32.1 9.35,29.2 ; U7.5@15.77,28.73 U7.5 14.17,28.73 13.7,29.2 9.35,29.2
NetD1_1: D1.1 D2.2 R1.2 U2.1 | length 38
  TopLayer w0.2: v1(31,38.5) 31,26.25 35.75,21.5 ; v1(31.01,48.81) U2.1 ; 35.95,21.004 37.796,21.004 R1.2
  BottomLayer w0.2: v1(31,38.5) 31,48.8 v1(31.01,48.81)
NetD3_2: D3.2 D5.2 | length 3.4
  BottomLayer w0.7: D3.2 D5.2
NetD4_2: D4.2 D6.2 | length 3.4
  BottomLayer w0.7: D4.2 D6.2
NetD7_2: D7.2 R3.1 TP1.1 U1.4 U7.4 | length 21.8
  TopLayer w0.2: 11.196,32.046 11.196,30 U7.4 ; 11.25,32.1 11.25,43.75 12.5,45 U1.4
NetL1_2: L1.2 R4.2 | length 10.2
  TopLayer w0.4: R4.2 30.04,17.21 33,14.25 L1.2
NetQ1_1: Q1.1 U1.6 | length 42.1
  TopLayer w0.2: v1(13.4,42.46) U1.6 ; Q1.1 v1(18.45,8.1)
  BottomLayer w0.2: v1(13.4,42.46) 11.8,40.86 11.8,12 14.6,9.2 17.35,9.2 v1(18.45,8.1)
NetTP2_1: TP2.1 U1.1 U7.6 | length 35.4
  TopLayer w0.2: U1.1 9.91,48.81 8.2,47.1 8.2,27.3 8.7,26.8 13.5,26.8 14.16,27.46 U7.6 U7.6@15.84,27.46
NetTP3_1: TP3.1 U1.3 U2.2 U2.3 U3.4 | length 66.7
  TopLayer w0.2: U1.3 15.77,46.27 16.4,46.9 32.4,46.9 ; U2.3 33.03,46.27 32.4,46.9 ; TP3.1@45.65,52 54.3,52 57,49.3 57,45.7 56.3,45 U3.4 ; TP3.1 46.5,45.8 41.1,40.4 38.3,40.4 37.4,41.3 37.4,46 35.86,47.54 U2.2 33.04,47.54 32.4,46.9
NetTP4_1: TP4.1 U3.3 U5.2 | length 34.4
  TopLayer w0.2: U5.2 34.265,28.635 33.5,29.4 33.5,36.2 36.3,39 43,39 50.27,46.27 U3.3
NetTP5_1: TP5.1 U3.6 U6.2 | length 16.2
  TopLayer w0.2: U3.6 54.16,42.46 53.4,41.7 53.4,29.5 54.265,28.635 U6.2
NetTP8_1: TP8.1 U1.5 U3.2 U3.5 | length 58.3
  TopLayer w0.2: U1.5 12.63,43.73 12,43.1 12,40.9 13.4,39.5 42.46,39.5 50.5,47.54 v1(53,47.54) U3.2 ; v1@52.93,43.73 v1(53,43.73) U3.5
  BottomLayer w0.2: v1(53,43.73) v1(53,47.54)
NetU2_4: U2.4 U3.1 | length 27.4
  TopLayer w0.2: U2.4 35.8,45 37,43.8 37,41 38,40 41.9,40 50.71,48.81 U3.1
NetU4_4: U4.4 U4.11 | length 5
  TopLayer w0.2: U4.4 U4.11
NetU4_5: U4.5 U4.8 | length 6.1
  TopLayer w0.2: U4.5 15.77,13.73 18.31,11.19 U4.8
NetU4_6: U4.6 U7.3 | length 23
  TopLayer w0.2: U4.6 14.24,12.46 12.8,13.9 12.8,21.9 16.765,25.865 16.765,30.235 15.73,31.27 U7.3
STATUS_LED: J1.A3 Q1.3 | length 24.6
  TopLayer w0.2: v1(17.5,3.9) Q1.3
  BottomLayer w0.2: v1(17.5,3.9) 27.2,3.9 28.65,2.45 J1.A3
TRIGGER_BUS: J1.B2 R7.2 U4.10 | length 30.9
  TopLayer w0.2: U4.10 22.43,13.73 R7.2 23.5,14.8 25.6,14.8 26.6,13.8 26.6,11.8 27.65,10.75 J1.B2
VCC_P5V0: C1.2 C2.2 C3.2 C4.2 C7.2 D1.2 J1.A17 J1.B17 Q1.2 U1.14 U2.14 U3.14 U4.14 U7.14 | length 170.5
  TopLayer w0.2: Q1.2 v1(16.55,8.1) ; C4.2 v1(20.9,21) ; C7.2 20,36 v1(20.9,36) ; C1.2 v1(20.9,51) ; C2.2 v1(40.9,51) ; 39.95,21.004 39.954,21.009 v1(41.2,21.009) ; C3.2 v1(60.9,51)
  TopLayer w0.4: C7.2 C7.2@20,35.8 ; C1.2 20,50.8 U1.14 ; U4.14 C4.2@20,20.8 ; U7.14 C7.2@20,35.8 ; C7.2@20,36.1 20,36 C7.2@20,35.8 ; C2.2 40,50.8 U2.14 ; C3.2 60,50.8 U3.14
  TopLayer w0.7: J1.B17 v1(44.65,-0.95)
  BottomLayer w0.2: v1(16.55,8.1) 17.25,7.4 20.1,7.4 20.9,8.2 v1(20.9,21)
  BottomLayer w0.7: J1.A17 v1(44.65,-0.95) 41.2,2.5 v1(41.2,21.009) 40.009,22.2 23.7,22.2 22.5,21 v1(20.9,21) v1(20.9,36) 20,36.9 20,50.1 v1(20.9,51) v1(40.9,51) 43.3,53.4 58.5,53.4 v1(60.9,51)
VCC_P18V: C5.2 C6.2 C8.2 C9.2 C10.2 C11.2 J1.A18 J1.B18 U5.1 U5.8 U6.1 U6.8 | length 95.8
  TopLayer w0.2: C11.2@37,32.254 C11.2@37.004,32.25 ; C10.2@57,31.634 C10.2@57,32
  TopLayer w0.4: U5.1 35,30.005 C5.2 C11.2@37,32 ; v1(37,30.9) C11.2@37,32 ; C11.2@37,32.254 C11.2@37,32.066 ; C11.2 37.366,32.066 C11.2@37,32.066 ; v1(38,30.9) C11.2@38,32 ; C11.2@38,32.254 C11.2@38,32 ; U5.8 40,30.005 C9.2 C11.2@38,32 ; U6.1 55,30.005 C6.2 C10.2@57,32 ; v1(57,30.834) 57,31.634 C10.2 57.634,32 C10.2@58,32 ; v1(58,30.834) C10.2@58,32 ; C10.2@58,32.188 C10.2@58,32 ; U6.8 60,30.005 C8.2 C10.2@58,32 ; C11.2@37,32 C11.2@37,32.066
  TopLayer w0.7: J1.B18 v1(45.65,-1.45)
  BottomLayer w0.7: v1(37,30.9) v1(38,30.9) 40.334,30.9 48.7,22.534 ; J1.A18 v1(45.65,-1.45) 45.65,0.75 47.3,2.4 49.9,2.4 51,3.5 51,6.5 48.7,8.8 48.7,22.534 ; v1(58,30.834) v1(57,30.834) 48.7,22.534
pads on no net: J1.A2 J1.A4 J1.A5 J1.A6 J1.A7 J1.A8 J1.A9 J1.A10 J1.A16 J1.B5 J1.B6 J1.B7 J1.B8 J1.B9 J1.B10 J1.B11 J1.B12 J1.B13 J1.B14 J1.B16 R4.3 U1.8 U1.9 U1.10 U1.13 U2.6 U2.8 U2.10 U2.12 U3.8 U3.11 U4.3 U5.3 U6.3 U7.1 U7.2 U7.8 U7.9 U7.10 U7.11 U7.12 U7.13

## Polygon pours and split planes (outlines as drawn)
GND on BottomLayer "Top Layer GND" (solid, remove dead copper, pour order 0): 0.5,69.5 74.5,69.5 74.5,0.5 0.5,0.5
GND on TopLayer "Top Layer GND" (solid, remove dead copper, pour order 2): 0.5,69.5 74.5,69.5 74.5,0.5 0.5,0.5
no net on InternalPlane2 (split plane): 75.867,0.383 46.3,0.383 46.225,0.376 46.154,0.354 46.087,0.318 46.029,0.271 45.982,0.213 45.946,0.147 45.925,0.075 45.917,0 45.917,-12.091 45.641,-12.367 39.759,-12.367 39.483,-12.091 39.483,-5.3 39.475,-5.151 39.45,-5.003 39.408,-4.86 39.351,-4.722 39.279,-4.591 39.192,-4.469 39.093,-4.357 38.981,-4.258 38.859,-4.171 38.728,-4.099 38.59,-4.042 38.447,-4 38.299,-3.975 38.15,-3.967 38.001,-3.975 37.853,-4 37.71,-4.042 37.572,-4.099 37.441,-4.171 37.319,-4.258 37.207,-4.357 37.108,-4.469 37.021,-4.591 36.949,-4.722 36.892,-4.86 36.85,-5.003 36.825,-5.151 36.817,-5.3 36.817,-12.091 36.541,-12.367 26.659,-12.367 26.383,-12.091 26.383,0 26.375,0.075 26.354,0.147 26.318,0.213 26.271,0.271 26.213,0.318 26.146,0.354 26.075,0.375 26,0.383 14.35,0.383 -0.867,0.383 -0.867,69.617 75.867,69.617
no net on InternalPlane1 (split plane): 75.867,0.383 46.3,0.383 46.225,0.376 46.154,0.354 46.087,0.318 46.029,0.271 45.982,0.213 45.946,0.147 45.925,0.075 45.917,0 45.917,-12.091 45.641,-12.367 39.759,-12.367 39.483,-12.091 39.483,-5.3 39.475,-5.151 39.45,-5.003 39.408,-4.86 39.351,-4.722 39.279,-4.591 39.192,-4.469 39.093,-4.357 38.981,-4.258 38.859,-4.171 38.728,-4.099 38.59,-4.042 38.447,-4 38.299,-3.975 38.15,-3.967 38.001,-3.975 37.853,-4 37.71,-4.042 37.572,-4.099 37.441,-4.171 37.319,-4.258 37.207,-4.357 37.108,-4.469 37.021,-4.591 36.949,-4.722 36.892,-4.86 36.85,-5.003 36.825,-5.151 36.817,-5.3 36.817,-12.091 36.541,-12.367 26.659,-12.367 26.383,-12.091 26.383,0 26.375,0.075 26.354,0.147 26.318,0.213 26.271,0.271 26.213,0.318 26.146,0.354 26.075,0.375 26,0.383 14.35,0.383 -0.867,0.383 -0.867,69.617 75.867,69.617

## Other copper
TopLayer:
  pour cut-out: 26.65,8.25 27.2,8.25 27.65,8.7
  pour cut-out: 27.65,10.75 27.7,10.8 28.65,10.8
  pour cut-out: 50.27,46.27 50.5,46.5 50.5,47.54 50.71,47.75 50.71,48.81
  pour cut-out: 28.65,13.55 29.65,15.09 29.65,13.5
  pour cut-out: 38.8,28.6 38.8,27.4 39.2,27.4 39.2,28.6
  pour cut-out: 58.8,28.6 58.8,27.3 59.3,27.3 59.3,28.6
  pour cut-out: 46.5,45.8 47.7,45.8 47.3,45.4

## Silkscreen, mask and mechanical layers (free items; w line width, h text height)
TopOverlay:
  text "TK514 Interrupter" at 21.7,65.7 h5
  text "O" at 14.75,62.75 h6
  text "Teslakom" at 22.7,62.7 h2.5
  text "Omega Verksted" at 36.7,62.7 h2.5
  text "Rev 1.0" at 26.24,59.7 h2.5
  text ".Print_Date" at 40.24,59.7 h2.5
BottomOverlay:
  text "TK514 Interrupter" at 56,56 h5
  text "Omega Verksted" at 37.9,53 h2.5
  text "Teslakom" at 55.5,53 h2.5
  text ".Print_Date" at 37.9,50 h2.5
  text "Rev 1.0" at 55.5,50 h2.5
  text "TP3" at 48.8,47.7 h1.5
  text "TP2" at 6.7,42.3 h1.5
  text "TP8" at 27.6,41.2 h1.5
  text "TP5" at 54.5,35.3 h1.5
  text "TP4" at 34.6,35 h1.5
  text "TP1" at 8.7,34.4 h1.5
  text "T" at 54.4,18.7 h40
  text "TP7" at 61.2,18.3 h1.5
  text "TP6" at 46.4,9.1 h1.5
PCI-SIG Outline:
  the board outline again, w0.1